# Altium PCB MCU(ZC-ST4X-A005A).PcbDoc (part 1 of 2)
Units mil, origin at the board's own origin, x right, y up, seen from the top; angles counter-clockwise.
Board outline 4255.94 x 3824.98 mil, 2 copper layers (Top Layer, Bottom Layer); 69 components, 79 nets, 331 pads, 521 vias.
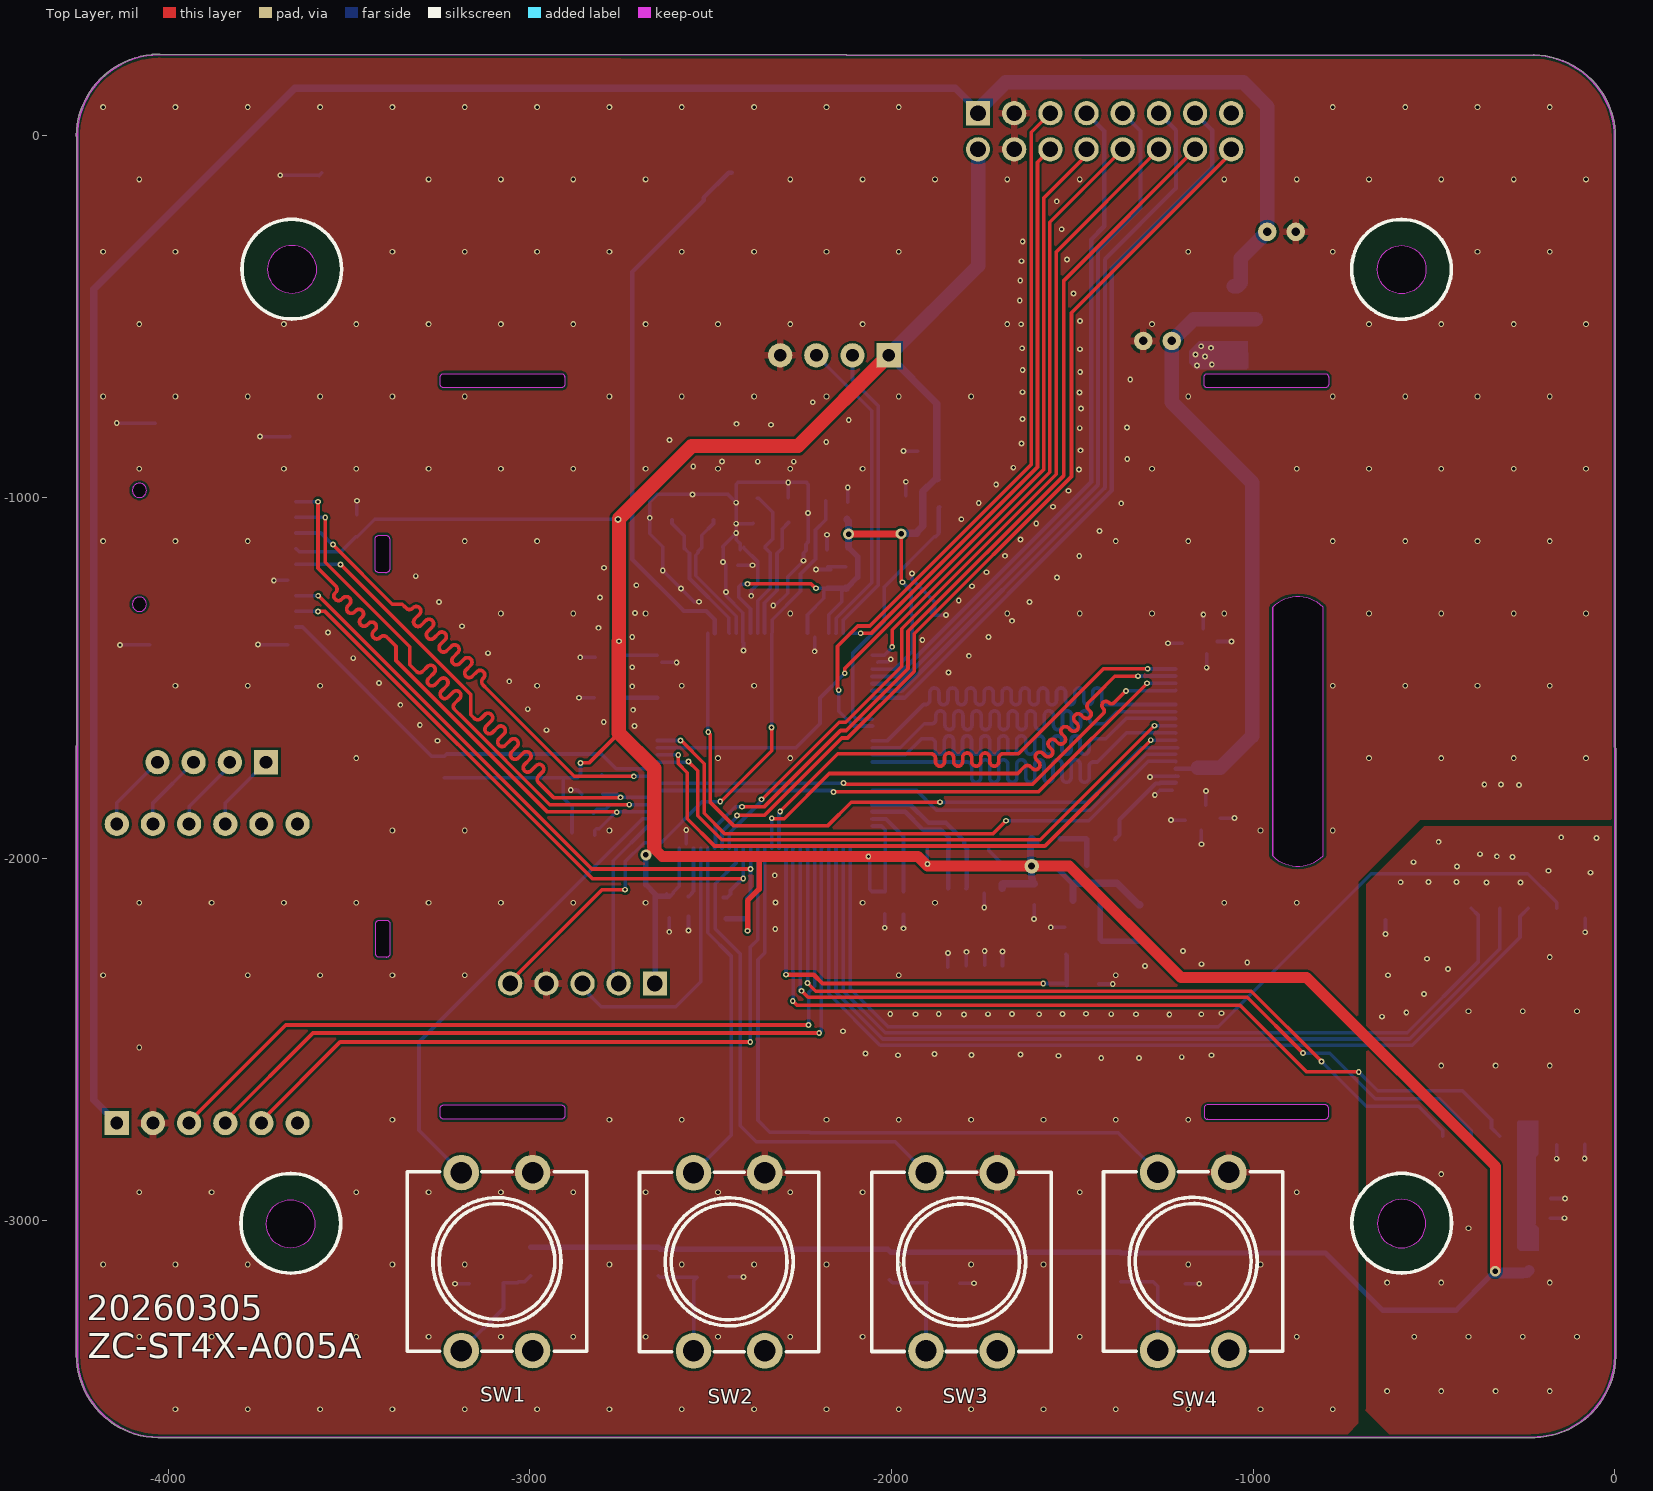
[diagram p0: Top Layer view]
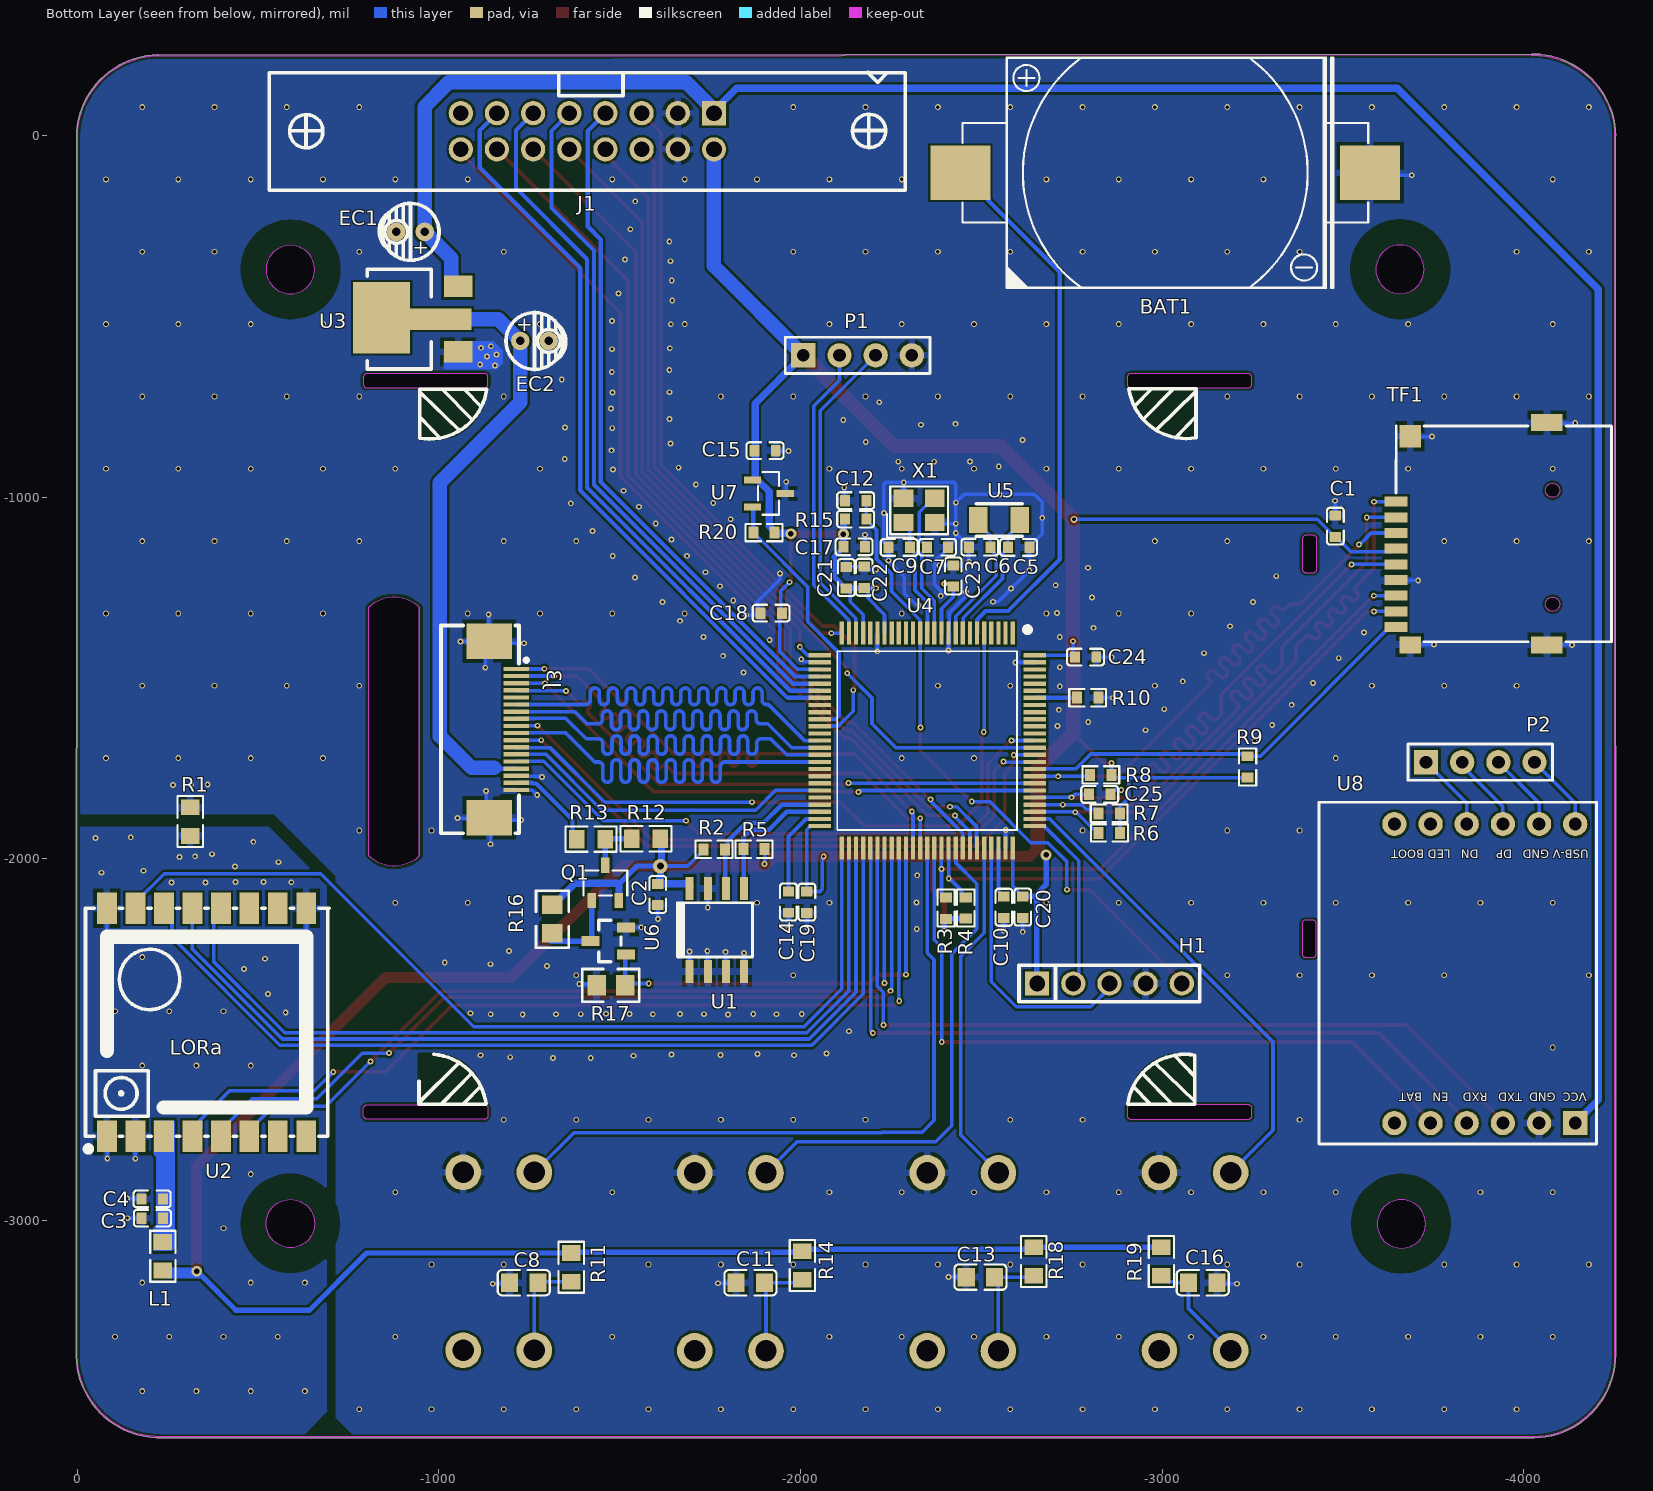
[diagram p1: Bottom Layer view, seen from below]

## Layer stack, top to bottom
Top Solder: solder mask 0.4, Solder Resist, Dk 3.5
Top Layer: signal copper 1.4
Dielectric 1: dielectric 12.6, FR-4, Dk 4.8
Bottom Layer: signal copper 1.4
Bottom Solder: solder mask 0.4, Solder Resist, Dk 3.5

## Board outline
-4253.37,-3371.43 -4253.37,-3371.22 ccw(c-4024.3,-3371.46) -4028.47,-3600.49 ccw(c-4028.14,-3599.04) -4028.14,-3600.53 -221.88,-3600.53 ccw(c-221.88,-3599.04) -220.69,-3599.94 ccw(c-226.96,-3370.96) 2.07,-3375.09 ccw(c0.59,-3374.8) 2.1,-3374.8 ccw(c0.59,-3374.8) 2.1,-3374.8 1.6,-9.95 ccw(c0.08,-9.95) 1.58,-9.71 ccw(c-227.46,-6.12) 1.61,-6.12 ccw(c-227.46,-6.12) -223.6,222.92 ccw(c-223.62,221.43) -225.11,221.47 -4022.21,224.44 ccw(c-4024.8,-4.62) -4027.03,224.44 -4043.88,224.45 ccw(c-4043.88,222.96) -4045.26,223.54 ccw(c-4024.8,-4.62) -4253.84,-0.75 ccw(c-4252.35,-0.78) -4252.87,-2.18
cut-out: -946.5,-1991.65 ccw(c-877.27,-1921.43) -807.05,-1990.65 -807.05,-1303.7 ccw(c-876.27,-1373.93) -946.5,-1304.7
cut-out: -4028.16,-3600.5 cw(c-4024.3,-3371.46) -4253.37,-3371.22 -4252.87,-2.18 cw(c-4252.35,-0.78) -4253.84,-0.75 cw(c-4024.8,-4.62) -4045.26,223.54 cw(c-4043.88,222.96) -4043.88,224.45 -4027.03,224.44 cw(c-4024.8,-4.62) -4022.21,224.44 -225.11,221.47 cw(c-223.62,221.43) -223.6,222.92 cw(c-227.46,-6.12) 1.61,-6.12 cw(c-227.46,-6.12) 1.58,-9.71 cw(c0.08,-9.95) 1.6,-9.95 2.1,-3374.8 cw(c0.59,-3374.8) 2.1,-3374.8 cw(c0.59,-3374.8) 2.07,-3375.09 cw(c-226.96,-3370.96) -220.69,-3599.94 cw(c-221.88,-3599.04) -221.88,-3600.53 -4024.3,-3600.53 cw(c-4024.3,-3599.04) -4024.3,-3597.55 -231.94,-3597.55 cw(c-230.8,-3598.5) -230.77,-3597.01 ccw(c-226.96,-3370.96) -0.91,-3375.04 cw(c0.59,-3374.8) -0.93,-3374.8 -1.43,-9.95 cw(c0.08,-9.95) -1.4,-9.66 ccw(c-227.46,-6.12) -1.37,-6.12 ccw(c-227.46,-6.12) -202.74,218.62 cw(c-203.38,219.96) -203.38,218.47 -4020.74,221.45 cw(c-4020.96,222.93) -4020.99,221.44 ccw(c-4024.8,-4.62) -4022.25,221.45 -4027,221.46 ccw(c-4024.8,-4.62) -4250.18,13.34 cw(c-4251.38,12.46) -4249.89,12.46 cw(c-4251.38,12.46) -4249.89,12.46 -4250.39,-3367.32 cw(c-4251.85,-3367.62) -4250.35,-3367.62 cw(c-4251.85,-3367.62) -4250.35,-3367.65 ccw(c-4024.3,-3371.46) -4250.39,-3371.43 ccw(c-4024.3,-3371.46) -4028.11,-3597.51 cw(c-4028.14,-3599.01) -4026.65,-3599.01 cw(c-4028.14,-3599.01)
cut-out: -3657.5,-436.97 cw(c-3657.5,-370.04) -3724.43,-370.04 cw(c-3657.5,-370.04) -3657.5,-303.11 cw(c-3657.5,-370.04) -3590.57,-370.04 cw(c-3657.5,-370.04)
cut-out: -3427.23,-1198.69 -3427.23,-1115.3 -3427.24,-1115.3 cw(c-3417.39,-1115.3) -3417.39,-1105.46 -3417.78,-1105.44 -3397.69,-1105.44 -3397.75,-1105.44 cw(c-3397.75,-1115.28) -3387.91,-1115.28 -3387.89,-1115.1 -3387.86,-1199.11 -3387.86,-1198.73 cw(c-3397.7,-1198.73) -3397.7,-1208.57 -3397.33,-1208.58 -3417.34,-1208.58 -3417.35,-1208.57 cw(c-3417.35,-1198.73)
cut-out: -3426.08,-2262.47 -3426.08,-2179.09 -3426.09,-2179.09 cw(c-3416.25,-2179.09) -3416.25,-2169.25 -3416.63,-2169.23 -3396.55,-2169.23 -3396.6,-2169.22 cw(c-3396.6,-2179.07) -3386.76,-2179.07 -3386.74,-2178.89 -3386.71,-2262.9 -3386.71,-2262.52 cw(c-3396.55,-2262.52) -3396.55,-2272.36 -3396.18,-2272.37 -3416.19,-2272.37 -3416.2,-2272.36 cw(c-3416.2,-2262.52)
cut-out: -1136.04,-2709.78 ccw(c-1126.19,-2709.78) -1126.19,-2719.62 -1126.58,-2719.61 -801.44,-2719.61 -801.39,-2719.57 ccw(c-801.39,-2709.73) -791.55,-2709.73 -791.54,-2709.72 -791.54,-2689.71 -791.55,-2690.08 ccw(c-801.39,-2690.08) -801.39,-2680.23 -801.01,-2680.24 -1126.2,-2680.24 -1126.19,-2680.23 ccw(c-1126.19,-2690.08) -1136.04,-2690.08 -1136.03,-2690.07
cut-out: -3247.84,-2710.14 -3247.84,-2690.13 cw(c-3237.99,-2690.13) -3237.99,-2680.28 -3237.95,-2680.24 -2912.81,-2680.24 -2913.19,-2680.23 cw(c-2913.19,-2690.08) -2903.35,-2690.08 -2903.36,-2689.69 -2903.36,-2709.78 -2903.35,-2709.78 cw(c-2913.19,-2709.78) -2913.19,-2719.62 -2913.19,-2719.61 -3238.38,-2719.61 -3237.99,-2719.62 cw(c-3237.99,-2709.78)
cut-out: -1126.19,-697.57 cw(c-1126.19,-687.73) -1136.04,-687.73 -1136.03,-688.11 -1136.03,-668.02 -1136.04,-668.03 cw(c-1126.19,-668.03) -1126.19,-658.19 -1126.2,-658.19 -801.01,-658.19 -801.39,-658.19 cw(c-801.39,-668.03) -791.55,-668.03 -791.54,-667.66 -791.54,-687.67 -791.55,-687.68 cw(c-801.39,-687.68) -801.39,-697.52 -801.44,-697.56
cut-out: -3237.99,-697.57 cw(c-3237.99,-687.73) -3247.84,-687.73 -3247.84,-688.1 -3247.84,-668.09 -3247.84,-668.08 cw(c-3237.99,-668.08) -3237.99,-658.24 -3237.95,-658.19 -2912.81,-658.19 -2913.19,-658.19 cw(c-2913.19,-668.03) -2903.35,-668.03 -2903.36,-667.65 -2903.36,-687.73 -2903.35,-687.73 cw(c-2913.19,-687.73) -2913.19,-697.57 -2913.19,-697.56
cut-out: -3247.84,-688.1 -3247.84,-668.09 -3247.84,-668.08 cw(c-3237.99,-668.08) -3237.99,-658.24 -3237.95,-658.19 -2912.81,-658.19 -2913.19,-658.19 cw(c-2913.19,-668.03) -2903.35,-668.03 -2903.36,-667.65 -2903.36,-687.73 -2903.35,-687.73 cw(c-2913.19,-687.73) -2913.19,-697.57 -2913.19,-697.56 -3238.38,-697.56 -3237.99,-697.57 cw(c-3237.99,-687.73)
cut-out: -589.52,-437.52 cw(c-589.52,-370.59) -656.45,-370.59 cw(c-589.52,-370.59) -589.52,-303.67 cw(c-589.52,-370.59) -522.59,-370.59 cw(c-589.52,-370.59)
cut-out: -656.67,-3008.09 ccw(c-589.74,-3008.09) -589.74,-3075.02 ccw(c-589.74,-3008.09) -522.81,-3008.09 ccw(c-589.74,-3008.09) -589.74,-2941.17 ccw(c-589.74,-3008.09)
cut-out: -3661.38,-3076.04 cw(c-3661.38,-3009.11) -3728.31,-3009.11 cw(c-3661.38,-3009.11) -3661.38,-2942.18 cw(c-3661.38,-3009.11) -3594.45,-3009.11 cw(c-3661.38,-3009.11)

## Design rules (kind name [scope] priority, off if disabled: settings)
Clearance "Stitching GND" [IsStitchingVia and InNet('GND') vs (IsVia and (Not IsStitchingVia)) Or IsPad] p1: gap=5 ignorepadtopadclearanceinfootprint=FALSE
Clearance [All] p2: gap=7 ignorepadtopadclearanceinfootprint=FALSE
MinimumSolderMaskSliver [All] p1: minsoldermaskwidth=0
PlaneConnect [All] p1: planeconnectstyle=Relief reliefexpansion=20 reliefentries=4 reliefconductorwidth=40 reliefairgap=10
PolygonConnect PolygonConnect_1 [IsVia] p1: connectstyle=Direct reliefconductorwidth=10 reliefentries=4 polygonreliefangle="90 Angle" airgapwidth=10
PolygonConnect [All] p2: connectstyle=Relief reliefconductorwidth=20 reliefentries=4 polygonreliefangle="90 Angle" airgapwidth=10
RoutingVias [All] p1: holewidth=28 width=50 viastyle="Through Hole" minholewidth=28 minwidth=50 maxholewidth=28 maxwidth=50
SilkToSilkClearance [All] p1: silktosilkclearance=0
SilkToSolderMaskClearance [IsPad] p1: minsilkscreentomaskgap=0 clearancetoexposedcopper=TRUE
SolderMaskExpansion [IsVia] p1: expansion=4 istentingtop=TRUE
Width [All] p1: maxlimit=50 minlimit=10 preferedwidth=10
26 further rules are at their usual default settings.

## Components (designator, comment, footprint, x,y, rotation, side; value= is the part's Value field where it differs from the comment)
BAT1 "KH-CR2032-2-1" BAT-TH_CR2032-BS-6-1 -3008.55,-102.9 r0 bottom locked
C1 "100nF" C-0603 -3478.85,-1080.12 r270 bottom
C2 "100nF" C-0603 -1605.5,-2098.35 r90 bottom
C3 "10uf" C-0603 -208.2,-2993.2 r180 bottom value=100nF
C4 "100nf" C-0603 -207.45,-2940.19 r180 bottom value=100nF
C5 "12pF" C-0603 -2603.03,-1138.75 r0 bottom
C6 "12pF" C-0603 -2495.9,-1138 r180 bottom
C7 "16pF" C-0603 -2378.73,-1138.4 r0 bottom
C8 "1uF" C-0805 -1234.98,-3171.7 r180 bottom
C9 "16pF" C-0603 -2273,-1138.8 r0 bottom
C10 "2.2uF" C-0603 -2562.35,-2133.65 r90 bottom
C11 "1uF" C-0805 -1861.67,-3171.7 r180 bottom
C12 "100nF" C-0603 -2152.57,-1009.4 r180 bottom
C13 "1uF" C-0805 -2497.58,-3156.21 r180 bottom locked
C14 "2.2uF" C-0603 -1966.8,-2119.35 r90 bottom
C15 "100nF" C-0603 -1902.1,-871.2 r0 bottom
C16 "1uF" C-0805 -3112.22,-3171.7 r0 bottom
C17 "10uF" C-0603 -2148.25,-1137.3 r0 bottom
C18 "100nF" C-0603 -1919,-1320.4 r180 bottom
C19 "100nF" C-0603 -2017.7,-2119.65 r90 bottom
C20 "100nF" C-0603 -2614.6,-2133.25 r90 bottom
C21 "100nF" C-0603 -2126.65,-1222.3 r270 bottom
C22 "100nF" C-0603 -2176.45,-1221.3 r270 bottom
C23 "100nF" C-0603 -2422.4,-1217.85 r270 bottom
C24 "100nF" C-0603 -2788.18,-1441.85 r0 bottom
C25 "22pF" C-0603 -2827.45,-1821.75 r180 bottom
EC1 "10uF" C4*H -921.9,-266.25 r0 bottom locked
EC2 "22uF" C4*H -1264.75,-568.05 r180 bottom
H1 "2.54-1*5" HDR-TH_5P-P2.54-V-M -2854.2,-2344.45 r180 bottom
J1 "HDR2.54-LI-2X8P" IDC-TH_16P-P2.54_BOOMELE-2X8P -1410.8,11.75 r0 bottom locked
J3 "PIN20" FPC-SMD_KH-CL0.5-H2.0-18PS -1176.95,-1642.15 r270 top locked
L1 "180nH" R-0805 -237.1,-3099.15 r90 bottom
P1 "Header 4" HDR2.54-M-LI-4P -2157.85,-607.7 r180 bottom
P2 "Header 4" HDR2.54-M-LI-4P -3879.5,-1732.7 r180 bottom
Q1 "IRLML6402TRPBF" SOT-23-3_L2.9-W1.6-P1.90-LS2.8-BR -1460.55,-2066.4 r270 bottom
R1 "0" R-0805 -312.9,-1896.6 r270 bottom
R2 "10K" R-0603 -1761.22,-1973.5 r0 bottom
R3 "TPM2S103P110R" R-0603 -2402.65,-2136.1 r270 bottom
R4 "TPM2S103P110R" R-0603 -2457.05,-2135.7 r270 bottom
R5 "10K" R-0603 -1871.65,-1973.15 r0 bottom
R6 "TPM2S103P110R" R-0603 -2854.08,-1928.05 r180 bottom
R7 "TPM2S103P110R" R-0603 -2853.48,-1874.1 r180 bottom
R8 "TPM2S103P110R" R-0603 -2830.4,-1768 r180 bottom
R9 "TPM2S103P110R" R-0603 -3236,-1745.75 r270 bottom
R10 "10K" R-0603 -2794.15,-1554.3 r0 bottom value=5.1K
R11 "10K" R-0805 -1366.25,-3129.65 r90 bottom value=5.1K
R12 "0Ω" R-0805 -1573.35,-1944.45 r0 bottom
R13 "55Ω" R-0805 -1420.4,-1945.3 r180 bottom
R14 "10K" R-0805 -2005.5,-3124.3 r90 bottom value=5.1K
R15 "10K" C-0603 -2152.5,-1060.35 r0 bottom value=5.1K
R16 "100kΩ" r0805 -1313.75,-2165.95 r90 bottom
R17 "100kΩ" r0805 -1475.85,-2349.4 r180 bottom
R18 "10K" R-0805 -2644.72,-3113.26 r90 bottom value=5.1K
R19 "10K" R-0805 -2997.97,-3113.26 r90 bottom value=5.1K
R20 "TPM2S103P110R" R-0603 -1899.3,-1097.9 r0 bottom
SW1 "Key" 12X12轻触按键 -3106.42,-3125.51 r90 top locked
SW2 "Key" 12X12轻触按键 -2464.47,-3126.31 r90 top locked
SW3 "Key" 12X12轻触按键 -1821.77,-3126.1 r90 top locked
SW4 "Key" 12X12轻触按键 -1181.47,-3124.85 r90 top locked
TF1 "TF-012" TF-SMD_TF-012 -3646.33,-1012.47 r90 bottom locked
U1 "AT24C02" SOIC-8 -1768.7,-2196.3 r90 bottom
U2 "Ra-02" WIRELM-SMD_RA-02-BL -357.95,-2451.45 r180 bottom locked
U3 "AMS1117-2.85" SOT-223-4 -947.7,-507.65 r180 bottom
U4 "STM32F407VGT6" LQFP-100_L14.0-W14.0-P0.50-LS16.0-BL -2586.72,-1375.7 r0 bottom locked
U5 "32768" CRYSTAL-SMD_L3.2-W1.5 -2549.5,-1063.11 r0 bottom
U6 "2N7002H6327" PG-SOT23-3_L2.9-W1.3-P1.90-LS2.4-BR -1468.4,-2227.1 r180 bottom
U7 "CT1720KR" SOT-23-3 -1912.85,-989.5 r270 bottom
U8 "U8" 4G -3892.05,-2316.96 r90 bottom locked
X1 "8MHz" CRYSTAL-SMD_4P-L3.2-W2.5-BL -2328,-1036.4 r180 bottom

## Footprints (in the part's own frame and the unit in brackets; to place one, negate y for a bottom-side part, rotate by r counter-clockwise, add the part's x,y. Pads: shape width x height; smd on the part's side, far side on the other; paste and mask are expansions set on the pad)
4G [mm] "4G模块"
  rect 1.7x1.7 hole 0.9: 1(-10.5,-6.35)
  round 1.7 hole 0.9: 2(-10.5,-3.81) 3(-10.5,-1.27) 4(-10.5,1.27) 5(-10.5,3.81) 6(-10.5,6.35) 7(10.5,-6.35) 8(10.5,-3.81) 9(10.5,-1.27) 10(10.5,1.27) 11(10.5,3.81) 12(10.5,6.35)
  Top Layer lines w0.254: -10.5,-3.81 -10.5,-3.419 ; 10.342,-1.27 10.5,-1.27 ; 10.5,0.879 10.5,1.27 ; 10.311,3.81 10.5,3.81
  Bottom Layer lines w0.254: -10.5,-3.81 -10.109,-3.81 ; 10.5,6.245 10.5,6.35 ; -10.5,-1.27 -10.5,-1.27
  Bottom Layer lines w0.508: -10.5,-6.35 -9.904,-5.754 ; -9.904,-5.754 -9.904,-5.754
  silkscreen extent -11.97,-7.85 12.03,11.65
12X12轻触按键 [mm]
  round 2.5 hole 1.5: 1(-5.941,2.104) 2(6.559,2.104) 3(-5.941,-2.896) 4(6.559,-2.896)
  silkscreen extent -5.99,-6.7 6.61,5.9
BAT-TH_CR2032-BS-6-1 [mm] "电池座CR2032"
  rect 4.2x3.8 smd paste+0.051: 1(14.385,0) 2(-14.385,0)
  silkscreen extent -14.25,-8.15 14.25,8.15
C4*H [mm]
  round 1.3 hole 0.6: 1(-1,0) 2(1,0)
  silkscreen extent -2,-2 2.2,2
C-0603 [mm] "贴片电容（缩小丝印层）"
  rect 0.7x0.8 smd: 1(-0.75,0) 2(0.75,0)
  silkscreen extent -1.3,-0.58 1.3,0.58, body extent -0.8,-0.41 0.8,0.41, height 0.81
C-0805 [mm] "贴片电容（缩小丝印层）"
  rect 1.2x1.3 smd: 1(-1,0) 2(1,0)
  silkscreen extent -1.83,-0.89 1.83,0.89, body extent -1,-0.61 1,0.61, height 0.51
CRYSTAL-SMD_4P-L3.2-W2.5-BL [mm]
  rect 1.4x1.2 smd paste+0 mask+0.051: 1(-1.1,-0.85) 2(1.1,-0.85) 3(1.1,0.85) 4(-1.1,0.85)
  silkscreen extent -2.26,-1.91 2.03,1.68
CRYSTAL-SMD_L3.2-W1.5 [mil]
  rect 51.2x70.9 smd paste+0 mask+2: 1(-57.4,0) 2(57.4,0)
  silkscreen extent -63,-45 63,45
FPC-SMD_KH-CL0.5-H2.0-18PS [mm]
  rect 0.3x1.8 smd far side: 1(-4.25,-0.95) 2(-3.75,-0.95) 3(-3.25,-0.95) 4(-2.75,-0.95) 5(-2.25,-0.95) 6(-1.75,-0.95) 7(-1.25,-0.95) 8(-0.75,-0.95) 9(-0.25,-0.95) 10(0.25,-0.95) 11(0.75,-0.95) 12(1.25,-0.95) 13(1.75,-0.95) 14(2.25,-0.95) 15(2.75,-0.95) 16(3.25,-0.95) 17(3.75,-0.95) 18(4.25,-0.95)
  rect 2.5x3.2 smd far side: 19(6.2,0.95) 20(-6.2,0.95)
HDR2.54-M-LI-4P [mm] "排母，4脚"
  rect 1.7x1.7 hole 0.9: 1(-3.81,0)
  round 1.7 hole 0.9: 2(-1.27,0) 3(1.27,0) 4(3.81,0)
  silkscreen extent -5.08,-1.27 5.08,1.27, body extent -5.08,-1.27 5.08,1.27, height 8.5
HDR-TH_5P-P2.54-V-M [mm]
  rect 1.7x1.7 hole 1.1 paste+0 mask+0.051: 1(-5.08,0)
  round 1.7 hole 1.1 paste+0 mask+0.051: 2(-2.54,0) 3(0,0) 4(2.54,0) 5(5.08,0)
  silkscreen extent -6.35,-1.27 6.35,1.27
IDC-TH_16P-P2.54_BOOMELE-2X8P [mm] "卡口款"
  rect 1.7x1.7 hole 1.1: 1(-8.89,-1.27)
  round 1.7 hole 1.1: 2(-8.89,1.27) 3(-6.35,-1.27) 4(-6.35,1.27) 5(-3.81,-1.27) 6(-3.81,1.27) 7(-1.27,-1.27) 8(-1.27,1.27) 9(1.27,-1.27) 10(1.27,1.27) 11(3.81,-1.27) 12(3.81,1.27) 13(6.35,-1.27) 14(6.35,1.27) 15(8.89,-1.27) 16(8.89,1.27)
  silkscreen extent -22.33,-4.14 22.35,4.14
LQFP-100_L14.0-W14.0-P0.50-LS16.0-BL [mm]
  rect 0.3x1.6 smd: 1(0,0) 2(0.5,0) 3(1,0) 4(1.5,0) 5(2,0) 6(2.5,0) 7(3,0) 8(3.5,0) 9(4,0) 10(4.5,0) 11(5,0) 12(5.5,0) 13(6,0) 14(6.5,0) 15(7,0) 16(7.5,0) 17(8,0) 18(8.5,0) 19(9,0) 20(9.5,0) 21(10,0) 22(10.5,0) 23(11,0) 24(11.5,0) 25(12,0) 51(12,15.1) 52(11.5,15.1) 53(11,15.1) 54(10.5,15.1) 55(10,15.1) 56(9.5,15.1) 57(9,15.1) 58(8.5,15.1) 59(8,15.1) 60(7.5,15.1) 61(7,15.1) 62(6.5,15.1) 63(6,15.1) 64(5.5,15.1) 65(5,15.1) 66(4.5,15.1) 67(4,15.1) 68(3.5,15.1) 69(3,15.1) 70(2.5,15.1) 71(2,15.1) 72(1.5,15.1) 73(1,15.1) 74(0.5,15.1) 75(0,15.1)
  rect 1.6x0.3 smd: 26(13.55,1.55) 27(13.55,2.05) 28(13.55,2.55) 29(13.55,3.05) 30(13.55,3.55) 31(13.55,4.05) 32(13.55,4.55) 33(13.55,5.05) 34(13.55,5.55) 35(13.55,6.05) 36(13.55,6.55) 37(13.55,7.05) 38(13.55,7.55) 39(13.55,8.05) 40(13.55,8.55) 41(13.55,9.05) 42(13.55,9.55) 43(13.55,10.05) 44(13.55,10.55) 45(13.55,11.05) 46(13.55,11.55) 47(13.55,12.05) 48(13.55,12.55) 49(13.55,13.05) 50(13.55,13.55) 76(-1.55,13.55) 77(-1.55,13.05) 78(-1.55,12.55) 79(-1.55,12.05) 80(-1.55,11.55) 81(-1.55,11.05) 82(-1.55,10.55) 83(-1.55,10.05) 84(-1.55,9.55) 85(-1.55,9.05) 86(-1.55,8.55) 87(-1.55,8.05) 88(-1.55,7.55) 89(-1.55,7.05) 90(-1.55,6.55) 91(-1.55,6.05) 92(-1.55,5.55) 93(-1.55,5.05) 94(-1.55,4.55) 95(-1.55,4.05) 96(-1.55,3.55) 97(-1.55,3.05) 98(-1.55,2.55) 99(-1.55,2.05) 100(-1.55,1.55)
  silkscreen extent -1.17,-0.37 12.32,13.83
PG-SOT23-3_L2.9-W1.3-P1.90-LS2.4-BR [mm]
  rect 1.25x0.7 smd paste+0 mask+0.051: 1(1.25,-0.95) 2(1.25,0.95) 3(-1.25,0)
  silkscreen extent -0.65,-1.46 0.9,1.46
r0805 [mm]
  rect 1.3x1.47 smd: 1(-1.003,0) 2(1.003,0)
  Top Layer pour cut-out: -0.978,0.737 1.181,0.737 1.181,-0.737 -0.978,-0.737
  silkscreen extent -2.01,-1.14 1.99,1.14, body extent -1.13,-0.67 1.17,0.68, height 0.76
R-0603 [mm] "贴片电阻"
  rect 0.7x0.85 smd: 1(-0.75,0) 2(0.75,0)
  silkscreen extent -1.3,-0.61 1.3,0.61, body extent -0.77,-0.4 0.83,0.4, height 0.45
R-0805 [mm] "贴片电阻"
  rect 1.1x1.3 smd: 1(-0.991,0) 2(1.016,0)
  silkscreen extent -1.78,-0.89 1.8,0.89, body extent -0.99,-0.64 1.01,0.62, height 0.55
SOIC-8 [mm]
  rect 1.6x0.56 smd paste+0: 1(-2.915,1.905) 2(-2.915,0.635) 3(-2.915,-0.635) 4(-2.915,-1.905) 5(2.915,-1.905) 6(2.915,-0.635) 7(2.915,0.635) 8(2.915,1.905)
  silkscreen extent -1.91,-2.5 1.91,2.75, body extent -3.1,-2.5 3.1,2.5, height 1.76
SOT-23-3 [mm] "3x1.3x1mm(长宽高)"
  rect 0.5x1.2 smd: 1(-0.95,-1.143) 2(0.95,-1.143) 3(0,1.143)
  silkscreen extent -1.5,-0.76 1.5,0.7, body extent -1.5,-1.2 1.5,1.2, height 1.05
SOT-23-3_L2.9-W1.6-P1.90-LS2.8-BR [mm]
  rect 1.07x0.6 smd paste+0 mask+0.051: 1(1.235,-0.95) 2(1.235,0.95) 3(-1.235,0)
  silkscreen extent -0.88,-1.54 0.88,1.54
SOT-223-4 [mm]
  rect 2x1.5 smd: 1(2.687,-2.3) 3(2.687,2.3)
  rect 4x5 smd: 2(-2.687,0.1)
  rect 5x1.5 smd: 2(1.137,0)
  silkscreen extent -3.69,-3.5 0.81,3.5
TF-SMD_TF-012 [mm] "TF卡槽（小卡）"
  rect 0.7x1.6 smd: 1(0,0) 2(-1.1,0) 3(-2.2,0) 4(-3.3,0) 5(-4.4,0) 6(-5.5,0) 7(-6.6,0) 8(-7.7,0) CD(-8.8,0)
  rect 1.2x1.5 smd: 10(-10.05,-1)
  rect 1.2x2.2 smd: 11(-10.05,-10.6) 12(5.55,-10.6)
  rect 1.6x1.5 smd: 13(4.6,-1)
  Keep-Out Layer board cut-out: 0.799,-11.501 0.607,-11.463 0.445,-11.354 0.337,-11.192 0.299,-11.001 0.299,-11.001 0.337,-10.809 0.445,-10.647 0.607,-10.539 0.799,-10.501 0.799,-10.501 0.99,-10.539 1.152,-10.647 1.261,-10.809 1.299,-11.001 1.299,-11.001 1.261,-11.192 1.152,-11.354 0.99,-11.463 0.799,-11.501
  Keep-Out Layer board cut-out: -7.2,-11.499 -7.391,-11.461 -7.553,-11.353 -7.662,-11.191 -7.7,-10.999 -7.7,-10.999 -7.662,-10.808 -7.553,-10.646 -7.391,-10.538 -7.2,-10.499 -7.2,-10.499 -7.008,-10.538 -6.846,-10.646 -6.738,-10.808 -6.7,-10.999 -6.7,-10.999 -6.738,-11.191 -6.846,-11.353 -7.008,-11.461 -7.2,-11.499
  Keep-Out Layer circle w0.003: c-7.2,-11 r0.5
  Keep-Out Layer circle w0.003: c0.8,-11 r0.5
  silkscreen extent -9.83,-15.13 5.32,0
WIRELM-SMD_RA-02-BL [mm]
  rect 1.4x2.2 smd: 1(-7,-8) 2(-5,-8) 3(-3,-8) 4(-1,-8) 5(1,-8) 6(3,-8) 7(5,-8) 8(7,-8) 9(7,8) 10(5,8) 11(3,8) 12(1,8) 13(-1,8) 14(-3,8) 15(-4.999,8) 16(-7,8)
  silkscreen extent -8.5,-9.1 8.6,8

## Part data
C1 C5 C6 C7 C8 C9 C10 C11 C12 C13 C14 C16 C17 C18 C19 C20 C21 C22 C23 C24 C25: library part C普通电容, "电容"
C2 C3 C4 C15: library part 0805B104K500NT, JLCPCB Part Class=ExtendedPart, LCSC Part Name=100nF±10%50V, Manufacturer=FH(风华), Temperature Coefficient=X7R, Tolerance=±10%, Voltage Rated=50V, Add into BOM=yes, Convert to PCB=yes, Datasheet=https://atta.szlcsc.com/upload/public/pdf/source/20170923/C38141_1506149447419988747.pdf, Device=0805B104K500NT, Manufacturer Part=0805B104K500NT, Name=100nF, Supplier=LCSC, Supplier Footprint=0805, Supplier Part=C38141
  C2 C3 C4: Symbol=CAPC1220X70N
  C15: Symbol=CL10A105KB8NNNC
EC1 EC2: library part CAP-EC
J1: "直插立式双排针"
L1: library part "0603' 180nH 2% 0.24A 车规", "贴片电感", 华芯物料编号=HXE0300100002, 厂商型号=LQW18ASR18G0ZD, 品牌=村田
P1 P2: "Header, 4-Pin", LatestRevisionDate=17-Jul-2002, LatestRevisionNote="Re-released for DXP Platform.", Publisher="Altium Limited"
Q1: library part IRLML6402TRPBF_C2593, Continuous Drain Current (Id)=3.7A, Drain Source On Resistance (RDS(on)@Vgs,Id)=65mΩ@4.5V,3.7A, Drain Source Voltage (Vdss)=20V, Gate Threshold Voltage (Vgs(th)@Id)=1.2V@250uA, JLCPCB Part Class=ExtendedPart, LCSC Part Name=P沟道20V3.7A, Manufacturer=Infineon(英飞凌), Power Dissipation (Pd)=1.3W, Add into BOM=yes, Convert to PCB=yes, Datasheet=https://atta.szlcsc.com/upload/public/pdf/source/20140818/1457707226203.pdf, Device=IRLML6402TRPBF_C2593, Manufacturer Part=IRLML6402TRPBF, Name=IRLML6402TRPBF, Supplier=LCSC, Supplier Footprint=SOT-23-3L, Supplier Part=C2593, Symbol=IRLML6402TRPBF, Type=P沟道
R1 R2 R5: library part 通用电阻, "贴片电阻，未编号，未录入华芯元件库，临时封装，包括0201，0402，0603，0805，1206，1210，1812，2010，2512"
R3 R4 R6 R7 R8 R9 R20: JLCPCB Part Class=ExtendedPart, Add into BOM=yes, Convert to PCB=yes, Datasheet=https://atta.szlcsc.comnull, Device=TPM2S103P110R, LCSC Part Name=TPM2S103P110R, Manufacturer Part=TPM2S103P110R, Name=10K, Supplier=LCSC, Supplier Footprint=10K-B3950-0805, Supplier Part=C9900018477, Symbol=TPM2S103P110R
R10 R11 R14 R15 R18 R19: library part RES, "电阻", LatestRevisionDate=17-Jul-2002, LatestRevisionNote="Re-released for DXP Platform.", PackageReference=AXIAL-0.4, Published=8-Jun-2000, Publisher="Altium Limited"
R12 R13: library part RES-SMD, "0603"
R16 R17: library part 0805W8F1002T5E_C17414, "电阻类型:厚膜电阻;阻值:10kΩ;精度:±1%;功率:125mW;温度系数:±100ppm/℃;最大工作电压:150V;工作温度范围:-55℃~+155℃;", JLCPCB Part Class=BasicPart, LCSC Part Name=10kΩ±1%125mW, Manufacturer=UNI-ROYAL(厚声), Manufacturer Part=0805W8F1002T5E, Operating Temperature Range=-55℃~+155℃, Overload Voltage (Max)=150V, Power(Watts)=125mW, Temperature Coefficient=±100ppm/℃, Tolerance=±1%, Add into BOM=yes, Convert to PCB=yes, Datasheet=https://atta.szlcsc.com/upload/public/pdf/source/20200306/C422600_1E6D84923E4A46A82E41ADD87F860B5C.pdf, Device=0805W8F1002T5E_C17414, Name=100kΩ, Supplier=LCSC, Supplier Footprint=0805, Supplier Part=C17414, Symbol=0805W8F1002T5E, Type=厚膜电阻
U1: library part AT24C02_C688857, JLCPCB Part Class="Extended Part", Manufacturer=IDCHIP(英锐芯), Add into BOM=yes, Convert to PCB=yes, Datasheet=https://atta.szlcsc.com/upload/public/pdf/source/20200619/C688857_168265888F77B455D6D4136881F4BB15.pdf, Device=AT24C02_C688857, LCSC Part Name=AT24C02, Manufacturer Part=AT24C02, Supplier=LCSC, Supplier Footprint=SOP-8, Supplier Part=C688857, Symbol=AT24C02
U2: library part Ra-02_C90039, JLCPCB Part Class="Extended Part", LCSC Part Name="433MHz LORA扩频无线模块 超远10KM SX1278", Manufacturer=Ai-Thinker(安信可), Operating Temperature=-40℃~+85℃, Operating Voltage=3.3V, Output Power=20dBm, Receive  Current=12.15mA, Send  Current=105mA, Add into BOM=yes, Antenna Type=IPEX接口, Convert to PCB=yes, Datasheet=https://atta.szlcsc.com/upload/public/pdf/source/20181018/C90039_B5D7ADB38ADA1100C85850A55553934D.pdf, Device=Ra-02_C90039, Manufacturer Part=Ra-02, Modulation System=LoRa；OOK；MSK；GFSK；FSK；GMSK, Sensitivity=-140dBm, Supplier=LCSC, Supplier Footprint=SMD-16P, Supplier Part=C90039, Support Interface=SPI, Symbol=RA-02
U3: library part AMS1117-XX, "AMS   800mA LOW DROPOUT VOLTAGE REGULATOR"
U5: library part 7N032768NW2
U6: library part "2N7002 H6327", JLCPCB Part Class=ExtendedPart, Manufacturer=Infineon(英飞凌), Add into BOM=yes, Convert to PCB=yes, Datasheet=https://atta.szlcsc.com/upload/public/pdf/source/20220830/BD30B6441EBE5CA0CCBEB0FC11431461.pdf, Device="2N7002 H6327", LCSC Part Name=2N7002H6327, Manufacturer Part=2N7002H6327, Name=2N7002H6327, Supplier=LCSC, Supplier Footprint=PG-SOT-23-3, Supplier Part=C533095, Symbol="2N7002 H6327"
U7: JLCPCB Part Class=ExtendedPart, Manufacturer=SENSYLINK(申矽凌), Add into BOM=yes, Convert to PCB=yes, Datasheet=https://atta.szlcsc.com/upload/public/pdf/source/20220810/E991F5BA30E48E4A6D2AB5BBD05BFFEE.pdf, Device=CT1720KR, LCSC Part Name=CT1720KR, Manufacturer Part=CT1720KR, Name=GX1832, Supplier=LCSC, Supplier Footprint=SOT-23, Supplier Part=C5121996, Symbol=CT1720KR
U8: library part 4G(ML307R)
X1: library part 无源晶振
BAT1: Symbol=KH-CR2032-2-1
TF1: Symbol=TF-012
U4: Symbol=STM32C031K6T6

## Via types
v1: diameter 16, hole 8, Top Layer to Bottom Layer, tented both sides, 270 vias
v2: diameter 16, hole 10, Top Layer to Bottom Layer, tented both sides, 245 vias
v3: diameter 30, hole 15, Top Layer to Bottom Layer, tented both sides, 4 vias
v4: diameter 40, hole 20, Top Layer to Bottom Layer, tented both sides, 1 vias
v5: diameter 20, hole 10, Top Layer to Bottom Layer, tented both sides, 1 vias

## Nets (pads, with @x,y where several pads share a name; then routed paths per layer and width w, separated by ;. In a path a pad name is that pad's centre, name@x,y a point inside that pad or via, vN(x,y) a via of type N, cw(c..) or ccw(c..) an arc to the next point about the centre after c; other vN are vias at no path point)
+5V: EC1.1 J1.1 U3.3 U8.1 | length 6480.4
  Bottom Layer w20: U8.1@-4142.05,-2730.35 -4205.65,-2666.75 -4205.65,-425.05 -3650.1,130.5 -1823.19,130.5 -1760.8,68.11 J1.1@-1776.86,52.05 ; J1.1@-1765.1,54.65 J1.1@-1765.1,66.05
  Bottom Layer w40: J1.1@-1765.1,54.65 -1747.34,72.41 -1747.34,83.46 -1684,146.8 -1028,146.8 -960.64,79.44 EC1.1@-960.64,-262.6 ; U3.3@-1053.51,-417.1 -1043.66,-417.1 -1034.14,-407.57 -1034.14,-339.12 EC1.1@-961.27,-266.25
CT1820: R20.2 U4.35 U7.2 | length 735.3
  Bottom Layer w10: U4.35@-2053.26,-1613.89 -2096.71,-1613.89 -2106.75,-1603.85 -2106.75,-1430.75 -2020.26,-1344.26 -2020.26,-1248.39 -1881.5,-1109.63 -1878.55,-1109.63 -1869.77,-1100.85 R20.2@-1869.77,-1097.9
  Bottom Layer w12: R20.2@-1869.77,-1097.9 -1869.77,-1028.83 U7.2@-1867.85,-1026.9
D1_JQ1: J1.7 U4.29 | length 1883.1
  Bottom Layer w12: U4.29@-2053.26,-1495.78 -2053.17,-1495.68 -1985.82,-1495.68 -1447.95,-957.81 -1447.95,-287.3 -1411.7,-251.05 -1411.7,12.65 J1.7@-1460.8,61.75
D1_JQ2: J1.9 U4.30 | length 1948.5
  Bottom Layer w12: U4.30@-2053.26,-1515.46 -1978.73,-1515.46 -1428.95,-965.68 -1428.95,-317.75 -1311.5,-200.3 -1311.5,12.45 J1.9@-1360.8,61.75
D1_JQ3: J1.11 U4.31 | length 2012.3
  Bottom Layer w12: U4.31@-2053.26,-1535.15 -1971.55,-1535.15 -1409.95,-973.55 -1409.95,-342 -1213.35,-145.4 -1213.35,14.3 J1.11@-1260.8,61.75
D1_JQ4: J1.13 U4.32 | length 2077.8
  Bottom Layer w12: U4.32@-2053.26,-1554.83 -1964.36,-1554.83 -1390.95,-981.42 -1390.95,-366.6 -1113.15,-88.8 -1113.15,14.1 J1.13@-1160.8,61.75
GND: BAT1.2 C1.1 C2.1 C5.1 C6.1 C7.1 C8.1 C9.2 C10.1 C11.1 C12.1 C13.1 C14.1 C15.1 C16.1 C17.1 C18.1 C19.1 C20.1 C21.1 C22.1 C23.1 C24.1 C25.2 EC1.2 EC2.2 H1.4 J1.3 J1.4 J3.16 J3.18 J3.19 J3.20 P1.4 R1.1 R10.1 R17.1 SW1.4 SW2.4 SW3.4 SW4.4 TF1.6 TF1.10 TF1.11 TF1.12 TF1.13 U1.1 U1.2 U1.3 U1.4 U1.7 U3.1 U4.10 U4.20 U4.27 U4.74 U4.99 U6.2 U7.3 U8.2 X1.2 X1.4 | length 4333.2
  Bottom Layer w10: v1(-4142.2,-795.15) TF1.12@-4035.59,-795.15 ; v1(-4133.2,-1408.45) TF1.11@-4051.39,-1408.45 ; v1(-3751.35,-1407.6) TF1.10@-3669.54,-1407.6 ; v1(-3746.1,-832.45) -3664.29,-832.45 TF1.13@-3664.14,-832.3 ; v1(-3707.75,-1229.95) TF1.6@-3668.88,-1229.95 ; v1(-3689.9,-109.8) -3583.29,-109.8 -3582.54,-110.55 BAT1.2@-3574.89,-102.9 ; C1.1@-3478.05,-1048.77 v1(-3478.05,-1009.9) ; v1(-3206.75,-3174.5) C16.1@-3167.88,-3174.5 ; -2878,-1808.75 -2871.62,-1808.75 -2869.36,-1811 -2865.76,-1811 -2856.98,-1819.78 C25.2@-2856.98,-1821.75 ; v1(-2863.95,-1554.45) R10.1@-2822.51,-1554.45 ; v1(-2860.6,-1442.7) C24.1@-2819.16,-1442.7 ; U4.99@-2635.44,-1456.65 v1(-2594,-1456.65) ; v1@-2615.6,-2202.65 v1(-2614.6,-2201.65) C20.1@-2614.6,-2162.78 ; U4.74@-2567.65,-1958.62 v1(-2567.65,-1919.75) ; v1(-2561.3,-2197.85) C10.1@-2561.3,-2158.98 ; v1(-2532.35,-1289.15) -2546,-1289.15 v1(-2632.56,-1202.59) C5.1@-2632.56,-1138.75 -2632.56,-1136.78 -2668.4,-1100.94 v1(-2668.4,-1056.97) -2668.4,-1013 -2647.75,-992.35 v1(-2550,-992.35) -2452.25,-992.35 v1(-2429.45,-1015.15) ; C6.1@-2466.37,-1138 -2466.37,-1136.03 v1(-2429.45,-1099.11) ; C6.1@-2465.65,-1137.61 v1(-2465.65,-1179.05) -2457.9,-1186.8 v1(-2457.9,-1262.25) -2457.9,-1272.6 -2411.15,-1319.35 -2411.15,-1400.83 -2409.1,-1402.88 v1(-2409.1,-1423.6) ; C13.1@-2448.42,-3155.7 v1(-2409.55,-3155.7) ; C23.1@-2425.54,-1188 v1(-2384.1,-1188) ; C7.1@-2417.8,-1144.84 -2417.8,-1129.23 -2429.45,-1117.58 v1(-2429.45,-1099.11) ; C7.1@-2408.26,-1138.4 -2408.26,-1140.37 -2369.35,-1179.27 -2369.35,-1239.27 -2387.75,-1257.67 v1(-2387.75,-1272.75) ; X1.2@-2381.91,-1071.85 -2383.31,-1073.25 v1(-2429.45,-1073.25) ; v1(-2327.15,-1299.1) -2321.25,-1299.1 -2287.32,-1265.17 -2287.32,-1219.74 v1(-2242.99,-1175.41) -2243.23,-1175.17 -2243.23,-1154.78 -2236.35,-1147.89 -2236.35,-1129.71 -2230.7,-1124.06 v1(-2230.7,-1044.06) -2230.7,-964.06 -2236.56,-958.2 -2280.06,-958.2 -2280.16,-958.3 -2285.45,-958.3 -2285.55,-958.2 -2285.65,-958.3 -2290.94,-958.3 -2291.04,-958.2 -2423.59,-958.2 -2429.45,-964.06 v1(-2429.45,-1015.15) ; X1.4@-2285.55,-1000.89 v1(-2285.55,-959.45) ; v1(-2212.5,-1426.15) U4.20@-2212.5,-1387.28 ; v1(-2209.2,-1199.95) C22.1@-2167.76,-1199.95 ; C17.1@-2178.55,-1145.24 v1(-2178.55,-1103.8) ; C22.1@-2176.45,-1191.77 -2175.95,-1192.27 -2127.15,-1192.27 C21.1@-2126.65,-1192.77 ; C12.1@-2120.9,-1014.34 v1(-2120.9,-972.9) ; U4.27@-2037.87,-1455.8 -2036.7,-1454.63 -2008.84,-1454.63 v1(-2002.24,-1448.02) ; v1(-2018.7,-2190.35) C19.1@-2018.7,-2151.48 ; v1(-1966.75,-2191.95) C14.1@-1966.75,-2153.08 ; v1(-1966.65,-872.6) C15.1@-1927.78,-872.6 ; U7.3@-1960.45,-996.02 v1(-1960.45,-957.15) ; v1(-1943.25,-1211.1) -1943.25,-1226.65 -1881.03,-1288.87 -1881.03,-1309.65 -1888.65,-1317.27 C18.1@-1889.2,-1317.27 ; C18.1@-1889.47,-1320.4 -1883.87,-1326 v1(-1849.35,-1326) ; U1.4@-1844.2,-2298.87 v1(-1844.2,-2260) ; C11.1@-1810.97,-3173.2 v1(-1772.1,-3173.2) ; U1.3@-1792.95,-2295.77 v1(-1792.95,-2256.9) ; v1(-1743.7,-2134.2) U1.7@-1743.7,-2095.33 ; U1.2@-1742.45,-2293.42 v1(-1742.45,-2254.55) ; U1.1@-1693.05,-2294.72 v1(-1693.05,-2255.85) ; v1(-1605.85,-2166.2) C2.1@-1605.85,-2127.33 ; v1(-1559.7,-2189.2) U6.2@-1520.83,-2189.2 ; R17.1@-1427.12,-2345.85 v1(-1388.25,-2345.85) ; v1(-1285.5,-1773.95) -1283.34,-1771.79 -1227.99,-1771.79 -1216.04,-1771.79 J3.16@-1214.35,-1770.1 ; v1(-1272.05,-1823.65) -1258.7,-1810.3 J3.18@-1224.13,-1810.3 ; v1(-1235.55,-1403.65) J3.20@-1196.68,-1403.65 ; v1(-1227.2,-1892.8) J3.19@-1188.33,-1892.8 ; J3.16@-1213.94,-1771.79 J3.16@-1206.8,-1771.79 ; C8.1@-1188.07,-3174.7 v1(-1149.2,-3174.7) ; v1(-1143.3,-1959.65) J3.19@-1143.3,-1920.78 ; J3.20@-1138,-1363.17 v1(-1138,-1324.3) ; J3.19@-1130.85,-1851.37 v1(-1130.85,-1812.5) ; v1(-1128.65,-1471.35) J3.20@-1128.65,-1432.48 ; J3.20@-1098.87,-1399 v1(-1060,-1399) ; J3.19@-1090.97,-1887.1 v1(-1052.1,-1887.1) ; v1(-2429.45,-1099.11) v1(-2429.45,-1073.25) ; v1(-2429.45,-1073.25) v1(-2429.45,-1015.15)
  other v1: -1420.3,-2550.55 -1316,-2550.55 -1197.7,-2548.25 -1538.6,-2544.35 -1982.15,-2542.8 -1779.05,-2542 -1115.2,-2542.8 -1643.65,-2540.45 -1881,-2539.65 -2071.65,-2538.1 -2133.95,-2476.65 -1799.55,-2430.1 -2003.5,-2429.1 -1934,-2429.45 -1869.35,-2429.1 -1733.1,-2429.25 -1591.85,-2429.55 -1392.4,-2429.25 -1324.05,-2429.55 -1232,-2429.85 -1143.45,-2429.55 -1666.65,-2428.9 -1527.6,-2428.6 -1462.1,-2428.25 -1087.64,-2426.86 -1299.15,-2295.95 -1142.75,-2291.1 -1016.5,-2286.8 -1193.95,-2254.95 -2321.55,-2194.15 -2320.7,-2120.45 -2322.8,-2045.5 -2886.95,-1809.55 -265.35,-1795.55 -361.05,-1794.1 -314.7,-1794.1 -3254.95,-1673.35 -2953.85,-1644.05 -2710.75,-1632.8 -3304.1,-1630.15 -2795.55,-1621.55 -2714.25,-1587.8 -3005.75,-1586.1 -3358.1,-1574 -2716.8,-1522.95 -3416.95,-1513.55 -3056.8,-1509.1 -1842.5,-1485 -2716.8,-1470.15 -3488.2,-1445 -1786.25,-1438.5 -3115.65,-1431.25 -1914.8,-1394.95 -2716.8,-1386.25 -1731.5,-1386.75 -3557.85,-1373.7 -2810.25,-1361.15 -3187.45,-1356.85 -1667,-1341.75 -2709.05,-1320.5 -1618.25,-1290 -3251.45,-1289.35 -1814.25,-1285.2 -2805.95,-1277.25 -2582.35,-1252.55 -1777.35,-1246.05 -2705.55,-1243.5 -1542.5,-1221.75 -3315.45,-1218.4 -1737.65,-1207.45 -2794.7,-1195.05 -1686.6,-1162.1 -1481,-1162.5 -1643.5,-1117.25 -1424.75,-1093.5 -1599.8,-1072.45 -1807,-1060.85 -1553.25,-1026.5 -1364.75,-1017 -1758.85,-1016.05 -1510.7,-982.25 -1710.7,-964.55 -1481.8,-923.8 -1663.25,-918.4 -2548.15,-914.75 -2468.55,-900.95 -2369.9,-901.8 -2270.45,-901.8 -1348.25,-894.75 -1477.8,-870.45 -1640.85,-851.3 -2180.45,-847.3 -2613.85,-842.1 -1479.5,-809.2 -1349,-807 -2333.6,-799.7 -2428.75,-797.1 -2118.15,-786.75 -1638.15,-783.45 -1476.1,-754.75 -2217.65,-737.4 -1480.1,-710.5 -1638.15,-709.55 -1340,-674.25 -1478.4,-653.75 -1637.45,-648.5 -1155.3,-636.25 -1114.4,-632.75 -1133.55,-611.1 -1159.95,-605.2 -1478.95,-590.75 -1638.8,-588.15 -1116.9,-586.95 -1143.9,-582.6 -1641.55,-521.7 -1478.95,-513.05 -1645.6,-455.9 -1497.05,-436.95 -1644.25,-401 -1640.85,-347.4 -1514.7,-342.65 -1637.45,-293.15 -1529.65,-259.25 -1543.2,-181.95
  other v2: -3979.9,-3521.44 -3779.9,-3521.44 -3579.9,-3521.44 -3379.9,-3521.44 -3179.9,-3521.44 -2979.9,-3521.44 -2779.9,-3521.44 -2579.9,-3521.44 -2379.9,-3521.44 -2179.9,-3521.44 -1979.9,-3521.44 -1779.9,-3521.44 -1579.9,-3521.44 -1379.9,-3521.44 -1179.9,-3521.44 -979.9,-3521.44 -779.9,-3521.44 -4079.9,-3321.44 -3879.9,-3321.44 -3679.9,-3321.44 -3479.9,-3321.44 -3279.9,-3321.44 -3079.9,-3321.44 -2879.9,-3321.44 -2679.9,-3321.44 -2479.9,-3321.44 -2279.9,-3321.44 -2079.9,-3321.44 -1479.9,-3321.44 -879.9,-3321.44 -4179.9,-3121.44 -3979.9,-3121.44 -3779.9,-3121.44 -3379.9,-3121.44 -3179.9,-3121.44 -2779.9,-3121.44 -2579.9,-3121.44 -2379.9,-3121.44 -2179.9,-3121.44 -1979.9,-3121.44 -1779.9,-3121.44 -1579.9,-3121.44 -1179.9,-3121.44 -979.9,-3121.44 -4079.9,-2921.44 -3879.9,-2921.44 -3479.9,-2921.44 -3279.9,-2921.44 -3079.9,-2921.44 -2879.9,-2921.44 -2679.9,-2921.44 -2479.9,-2921.44 -2279.9,-2921.44 -2079.9,-2921.44 -1479.9,-2921.44 -879.9,-2921.44 -3379.9,-2721.44 -2779.9,-2721.44 -2579.9,-2721.44 -2179.9,-2721.44 -1979.9,-2721.44 -1779.9,-2721.44 -1579.9,-2721.44 -1379.9,-2721.44 -1179.9,-2721.44 -4079.9,-2521.44 -4179.9,-2321.44 -3779.9,-2321.44 -3579.9,-2321.44 -3379.9,-2321.44 -3179.9,-2321.44 -1979.9,-2321.44 -1379.9,-2321.44 -4079.9,-2121.44 -3879.9,-2121.44 -3679.9,-2121.44 -3479.9,-2121.44 -3279.9,-2121.44 -3079.9,-2121.44 -2879.9,-2121.44 -2679.9,-2121.44 -2079.9,-2121.44 -1879.9,-2121.44 -1079.9,-2121.44 -879.9,-2121.44 -3379.9,-1921.44 -3179.9,-1921.44 -2779.9,-1921.44 -979.9,-1921.44 -779.9,-1921.44 -3479.9,-1721.44 -2479.9,-1721.44 -2279.9,-1721.44 -679.9,-1721.44 -479.9,-1721.44 -279.9,-1721.44 -79.9,-1721.44 -3979.9,-1521.44 -3779.9,-1521.44 -3579.9,-1521.44 -2979.9,-1521.44 -2579.9,-1521.44 -2379.9,-1521.44 -779.9,-1521.44 -579.9,-1521.44 -379.9,-1521.44 -179.9,-1521.44 -3079.9,-1321.44 -2879.9,-1321.44 -2679.9,-1321.44 -2279.9,-1321.44 -1679.9,-1321.44 -1479.9,-1321.44 -1279.9,-1321.44 -1079.9,-1321.44 -679.9,-1321.44 -479.9,-1321.44 -279.9,-1321.44 -79.9,-1321.44 -4179.9,-1121.44 -3979.9,-1121.44 -3779.9,-1121.44 -3179.9,-1121.44 -2979.9,-1121.44 -1379.9,-1121.44 -1179.9,-1121.44 -779.9,-1121.44 -579.9,-1121.44 -379.9,-1121.44 -179.9,-1121.44 -4079.9,-921.44 -3679.9,-921.44 -3479.9,-921.44 -3279.9,-921.44 -3079.9,-921.44 -2879.9,-921.44 -2679.9,-921.44 -2479.9,-921.44 -2279.9,-921.44 -2079.9,-921.44 -1279.9,-921.44 -879.9,-921.44 -679.9,-921.44 -479.9,-921.44 -279.9,-921.44 -79.9,-921.44 -4179.9,-721.44 -3979.9,-721.44 -3779.9,-721.44 -3579.9,-721.44 -3379.9,-721.44 -3179.9,-721.44 -2779.9,-721.44 -2579.9,-721.44 -2379.9,-721.44 -2179.9,-721.44 -1979.9,-721.44 -1779.9,-721.44 -1179.9,-721.44 -779.9,-721.44 -579.9,-721.44 -379.9,-721.44 -179.9,-721.44 -4079.9,-521.44 -3679.9,-521.44 -3479.9,-521.44 -3279.9,-521.44 -3079.9,-521.44 -2879.9,-521.44 -2679.9,-521.44 -2479.9,-521.44 -2279.9,-521.44 -2079.9,-521.44 -1679.9,-521.44 -1279.9,-521.44 -679.9,-521.44 -479.9,-521.44 -279.9,-521.44 -79.9,-521.44 -4179.9,-321.44 -3979.9,-321.44 -3379.9,-321.44 -3179.9,-321.44 -2979.9,-321.44 -2779.9,-321.44 -2579.9,-321.44 -2379.9,-321.44 -2179.9,-321.44 -1979.9,-321.44 -1179.9,-321.44 -779.9,-321.44 -379.9,-321.44 -179.9,-321.44 -4079.9,-121.44 -3279.9,-121.44 -3079.9,-121.44 -2879.9,-121.44 -2679.9,-121.44 -2279.9,-121.44 -2079.9,-121.44 -1879.9,-121.44 -1679.9,-121.44 -1479.9,-121.44 -1079.9,-121.44 -879.9,-121.44 -679.9,-121.44 -479.9,-121.44 -279.9,-121.44 -79.9,-121.44 -4179.9,78.56 -3979.9,78.56 -3779.9,78.56 -3579.9,78.56 -3379.9,78.56 -3179.9,78.56 -2979.9,78.56 -2779.9,78.56 -2579.9,78.56 -2379.9,78.56 -2179.9,78.56 -1979.9,78.56 -779.9,78.56 -579.9,78.56 -379.9,78.56 -179.9,78.56
I2C2_EEPROM-SCL: R2.1 U1.6 U4.47 | length 431.3
  Bottom Layer w12: U4.47@-2053.26,-1850.11 -1947.94,-1850.11 -1897.75,-1900.3 -1849.55,-1900.3 -1798.53,-1951.32 -1798.53,-1965.72 R2.1@-1790.75,-1973.5 -1792.23,-1974.98 -1792.23,-2080.08 U1.6@-1793.7,-2081.55
I2C2_EEPROM-SDA: R5.2 U1.5 U4.48 | length 382
  Bottom Layer w12: U4.48@-2053.26,-1869.79 -1962.1,-1869.79 -1912.59,-1919.3 -1863.55,-1919.3 -1842.12,-1940.73 R5.2@-1842.12,-1973.15 -1842.91,-1973.94 -1842.91,-2080.76 U1.5@-1843.7,-2081.55
KEY1: SW1.2 U4.77 | length 1328.2
  Top Layer w10: SW1.2@-3193.98,-2867.27 SW1.2@-3189.25,-2867.27
  Bottom Layer w10: SW1.2@-3189.25,-2867.27 -3306.3,-2750.22 -3306.3,-2506.35 -2689.42,-1889.48 U4.77@-2647.74,-1889.48
KEY2: SW2.2 U4.71 | length 967.6
  Bottom Layer w10: SW2.2@-2547.3,-2868.07 -2443.55,-2764.33 -2443.55,-2268.35 -2507.98,-2203.92 U4.71@-2507.98,-1970.18
KEY3: SW3.2 U4.67 | length 1388.3
  Bottom Layer w10: U4.67@-2429.24,-1970.18 -2430.15,-1971.09 -2430.15,-2011.55 -2487.6,-2069 -2487.6,-2193.65 -2418.3,-2262.95 -2418.3,-2738.15 -2374.15,-2782.3 -1990.18,-2782.3 SW3.2@-1904.6,-2867.87
KEY4: SW4.2 U4.63 | length 1924.8
  Bottom Layer w10: U4.63@-2350.5,-1970.18 -2350.5,-2260 -2369.3,-2278.8 -2369.3,-2722.5 -2336.45,-2755.35 -2226.15,-2755.35 -2223.85,-2757.65 -1373.27,-2757.65 SW4.2@-1264.3,-2866.62
LCD_CS: J3.14 U4.88 | length 1704.7
  Top Layer w10: v1(-2583.3,-1672.62) -2581.71,-1672.62 -2517.68,-1736.66 -2517.68,-1873.98 -2461.56,-1930.1 -1719.25,-1930.1 v1(-1683.7,-1894.55)
  Bottom Layer w10: U4.88@-2647.74,-1672.94 -2647.58,-1672.78 -2583.46,-1672.78 v1(-2583.3,-1672.62) ; v1@-1684.53,-1894.4 -1454.75,-1894.4 -1290.18,-1729.83 -1215.26,-1729.83 J3.14@-1214.35,-1730.73
LCD_DB0: J3.1 U4.61 | length 1559.8
  Top Layer w10: v1(-2307.9,-1868.6) -2148.7,-1709.4 -1920.93,-1709.4 -1890.93,-1709.4 cw(c-1890.93,-1721.9) -1878.43,-1721.9 -1878.43,-1730.96 ccw(c-1865.93,-1730.96) -1853.43,-1730.96 -1853.43,-1719.7 cw(c-1840.93,-1719.7) -1828.43,-1719.7 -1828.43,-1730.96 ccw(c-1815.93,-1730.96) -1803.43,-1730.96 -1803.43,-1719.7 cw(c-1790.93,-1719.7) -1778.43,-1719.7 -1778.43,-1730.96 ccw(c-1765.93,-1730.96) -1753.43,-1730.96 -1753.43,-1719.7 cw(c-1740.93,-1719.7) -1728.43,-1719.7 -1728.43,-1730.96 ccw(c-1715.93,-1730.96) -1703.43,-1730.96 -1703.43,-1721.9 cw(c-1690.93,-1721.9) -1690.93,-1709.4 -1657.1,-1709.4 -1649.2,-1709.4 -1414.15,-1474.35 v1(-1291.85,-1474.35)
  Bottom Layer w10: U4.61@-2311.13,-1970.18 -2311.13,-1873.45 -2307.9,-1870.22 v1(-2307.9,-1868.6) ; v1(-1291.85,-1474.35) -1291.37,-1474.83 J3.1@-1214.35,-1474.83
LCD_DB1: J3.2 U4.62 | length 1581.7
  Top Layer w10: v1(-2331.13,-1887.59) -2330.12,-1888.6 -2296.95,-1888.6 -2172.35,-1764 -1656.61,-1764 -1651.4,-1764 -1632.79,-1745.39 cw(c-1623.95,-1754.23) -1615.11,-1745.39 -1610.97,-1749.53 ccw(c-1602.13,-1740.7) -1593.29,-1749.54 ccw(c-1602.13,-1740.7) -1593.29,-1731.86 -1598.97,-1726.18 cw(c-1590.13,-1717.34) -1598.97,-1708.5 cw(c-1590.13,-1717.34) -1581.3,-1708.5 -1575.62,-1714.18 ccw(c-1566.78,-1705.34) -1557.94,-1714.18 ccw(c-1566.78,-1705.34) -1557.94,-1696.5 -1563.62,-1690.82 cw(c-1554.78,-1681.99) -1563.62,-1673.15 cw(c-1554.78,-1681.99) -1545.94,-1673.15 -1540.26,-1678.82 ccw(c-1531.42,-1669.99) -1522.58,-1678.82 ccw(c-1531.42,-1669.99) -1522.58,-1661.15 -1528.26,-1655.47 cw(c-1519.42,-1646.63) -1528.26,-1637.79 cw(c-1519.42,-1646.63) -1510.58,-1637.79 -1504.91,-1643.47 ccw(c-1496.07,-1634.63) -1487.23,-1643.47 ccw(c-1496.07,-1634.63) -1487.23,-1625.79 -1492.91,-1620.11 cw(c-1484.07,-1611.27) -1492.91,-1602.44 cw(c-1484.07,-1611.27) -1475.23,-1602.44 -1469.55,-1608.11 ccw(c-1460.71,-1599.27) -1451.87,-1608.11 ccw(c-1460.71,-1599.28) -1451.87,-1590.44 -1456.02,-1586.29 cw(c-1447.18,-1577.45) -1456.02,-1568.62 -1435.96,-1548.56 -1382.5,-1495.1 v1@-1318.9,-1495.1
  Bottom Layer w10: v1(-2331.13,-1887.59) -2330.97,-1887.75 -2330.97,-1970.02 U4.62@-2330.82,-1970.18 ; v1@-1319.01,-1494.45 -1214.41,-1494.45 J3.2@-1214.35,-1494.51
  other v1: -1318.9,-1494.85
LCD_DB2: J3.3 U4.81 | length 1559.9
  Top Layer w10: v1(-2160.49,-1814.76) -1593.68,-1814.76 -1293.37,-1514.45 v1(-1293.31,-1514.45)
  Bottom Layer w10: U4.81@-2647.74,-1810.73 -2647.63,-1810.85 -2166.02,-1810.85 -2162.12,-1814.76 v1(-2160.49,-1814.76) ; v1(-1293.31,-1514.45) v1(-1293.31,-1514.45) -1292.88,-1514.82 -1214.98,-1514.82 J3.3@-1214.35,-1514.2
LCD_DB3: J3.4 U4.82 | length 1567.2
  Top Layer w10: v1(-2132.85,-1790.4) -2130.1,-1793.15 -1609.5,-1793.15 -1418.72,-1602.37 -1415.18,-1598.83 ccw(c-1422.96,-1591.05) -1415.18,-1583.28 ; -1415.21,-1583.24 cw(c-1407.44,-1575.47) -1415.21,-1567.69 cw(c-1407.44,-1575.47) -1399.66,-1567.69 ; -1399.63,-1567.72 ccw(c-1391.85,-1559.94) -1384.07,-1567.72 -1362.08,-1545.73 v1(-1351.8,-1535.45)
  Bottom Layer w10: U4.82@-2647.74,-1791.05 -2647.42,-1790.72 -2133.17,-1790.72 v1(-2132.85,-1790.4) ; v1@-1351.8,-1534.39 -1351.52,-1534.67 -1215.14,-1534.67 J3.4@-1214.35,-1533.88
LCD_DB4: J3.6 U4.38 | length 1590
  Bottom Layer w10: U4.38@-2053.26,-1672.94 -2011.09,-1672.94 -1911.4,-1573.25 -1906.4,-1573.25 ccw(c-1906.4,-1560.75) -1893.9,-1560.75 -1893.9,-1539.92 cw(c-1881.4,-1539.92) -1868.9,-1539.92 -1868.9,-1561.18 ccw(c-1856.4,-1561.18) -1843.9,-1561.18 -1843.9,-1539.92 cw(c-1831.4,-1539.92) -1818.9,-1539.92 -1818.9,-1561.18 ccw(c-1806.4,-1561.18) -1793.9,-1561.18 -1793.9,-1539.92 cw(c-1781.4,-1539.92) -1768.9,-1539.92 -1768.9,-1561.18 ccw(c-1756.4,-1561.18) -1743.9,-1561.18 -1743.9,-1539.92 cw(c-1731.4,-1539.92) -1718.9,-1539.92 -1718.9,-1561.18 ccw(c-1706.4,-1561.18) -1693.9,-1561.18 -1693.9,-1539.92 cw(c-1681.4,-1539.92) -1668.9,-1539.92 -1668.9,-1561.18 ccw(c-1656.4,-1561.18) -1643.9,-1561.18 -1643.9,-1539.92 cw(c-1631.4,-1539.92) -1618.9,-1539.92 -1618.9,-1561.18 ccw(c-1606.4,-1561.18) -1593.9,-1561.18 -1593.9,-1539.92 cw(c-1581.4,-1539.92) -1568.9,-1539.92 -1568.9,-1561.18 ccw(c-1556.4,-1561.18) -1543.9,-1561.18 -1543.9,-1539.92 cw(c-1531.4,-1539.92) -1518.9,-1539.92 -1518.9,-1561.18 ccw(c-1506.4,-1561.18) -1493.9,-1561.18 -1493.9,-1539.92 cw(c-1481.4,-1539.92) -1468.9,-1539.92 -1468.9,-1561.18 ccw(c-1456.4,-1561.18) -1443.9,-1561.18 -1443.9,-1539.92 cw(c-1431.4,-1539.92) -1418.9,-1539.92 -1418.9,-1560.75 ccw(c-1406.4,-1560.75) -1406.4,-1573.25 -1385.49,-1573.25 J3.6@-1214.35,-1573.25